# Altium PCB RelayPCB.PcbDoc
Units mil, origin at the board's own origin, x right, y up, seen from the top; angles counter-clockwise.
Board outline 3340 x 2160 mil, 2 copper layers (Top Layer, Bottom Layer); 61 components, 41 nets, 187 pads, 97 vias.
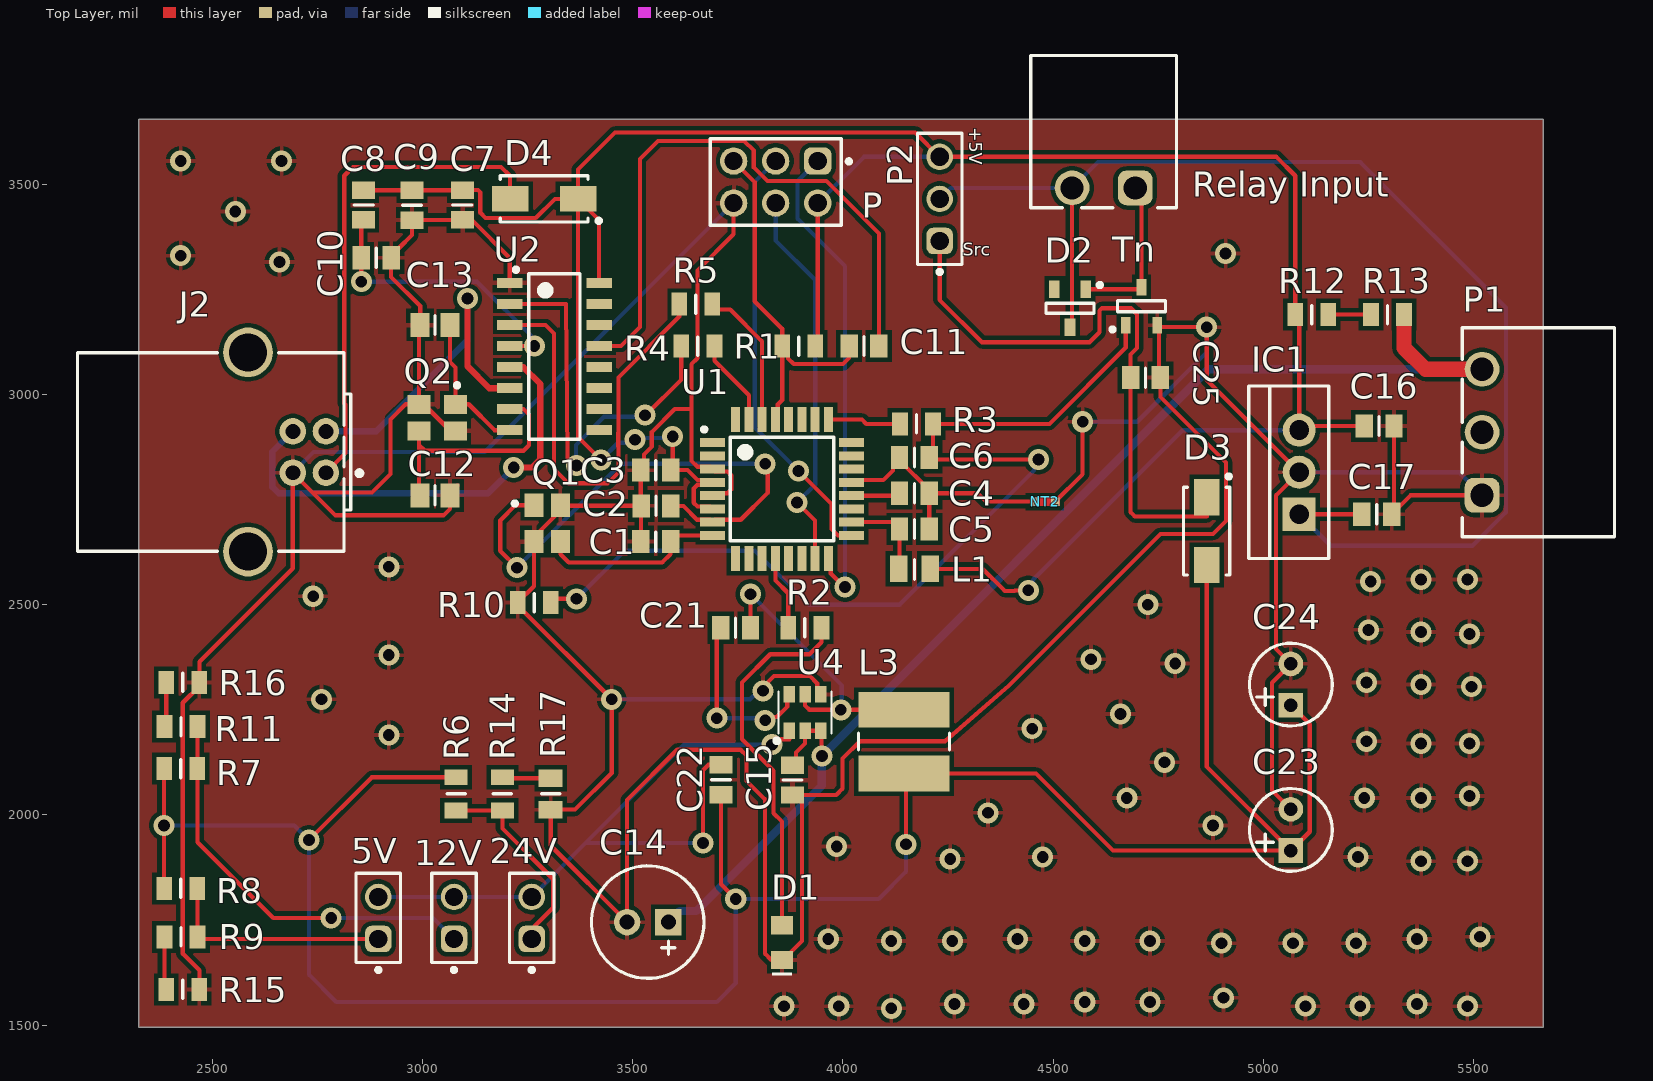
[diagram p0: Top Layer view]
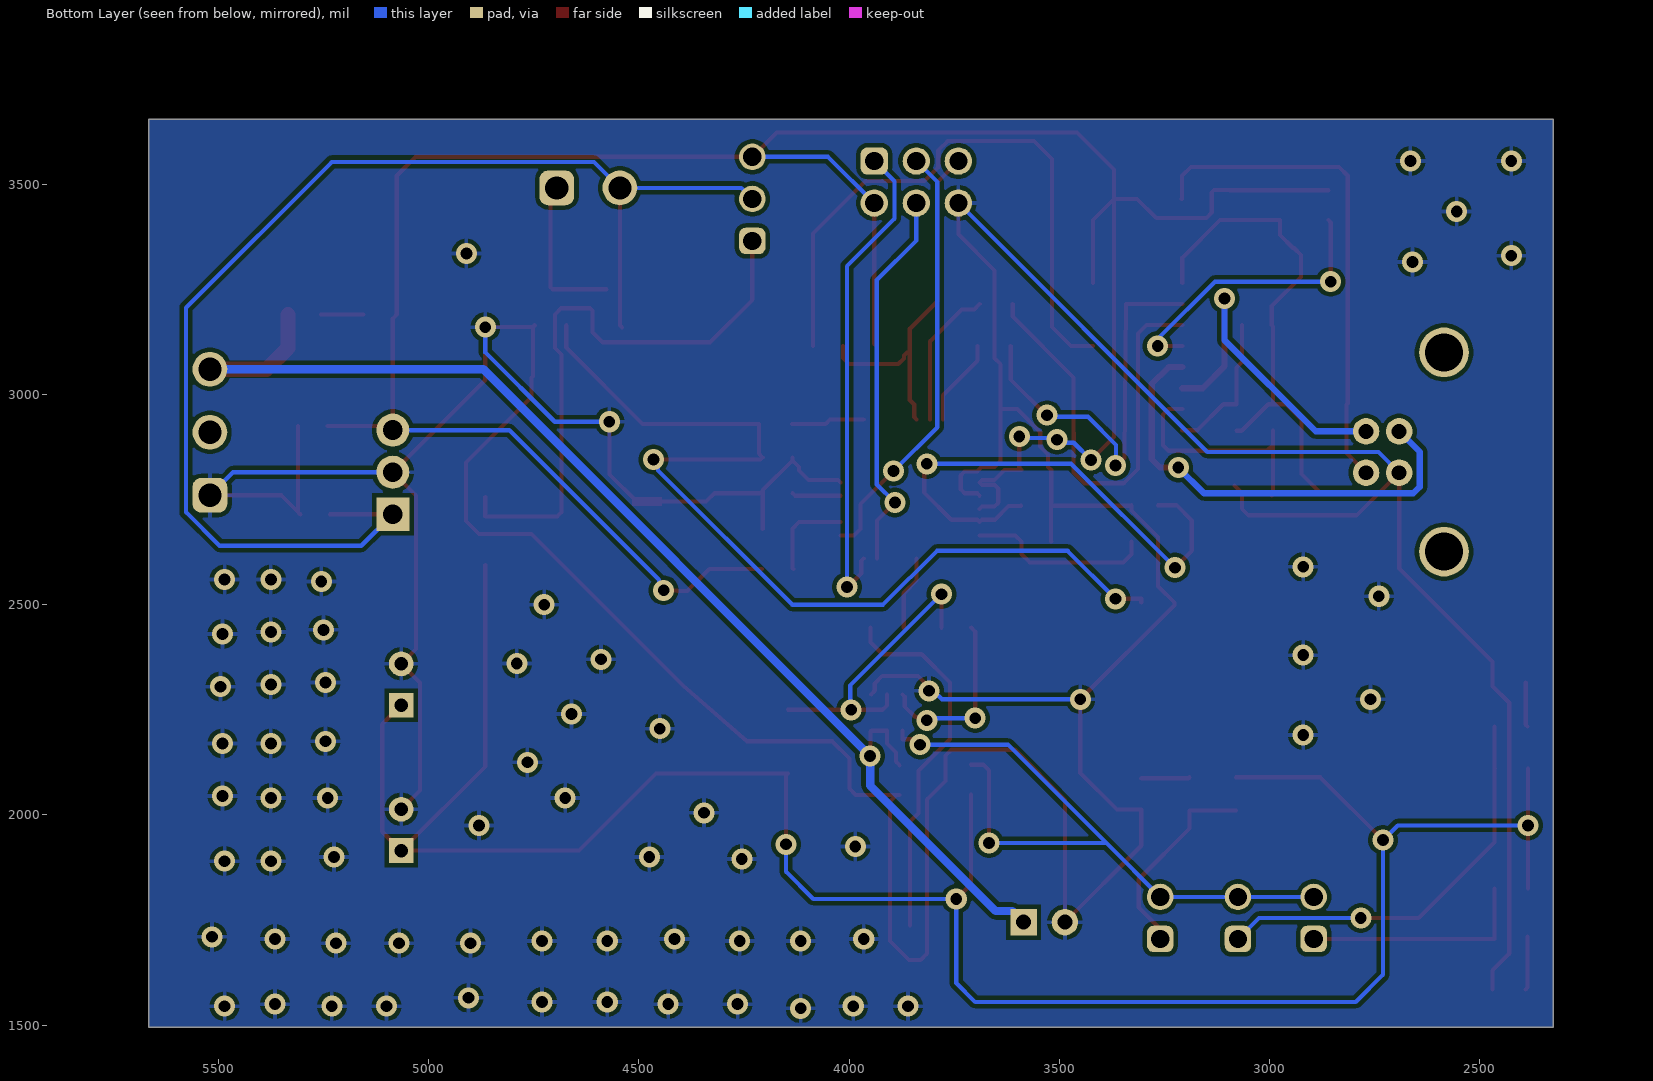
[diagram p1: Bottom Layer view, seen from below]
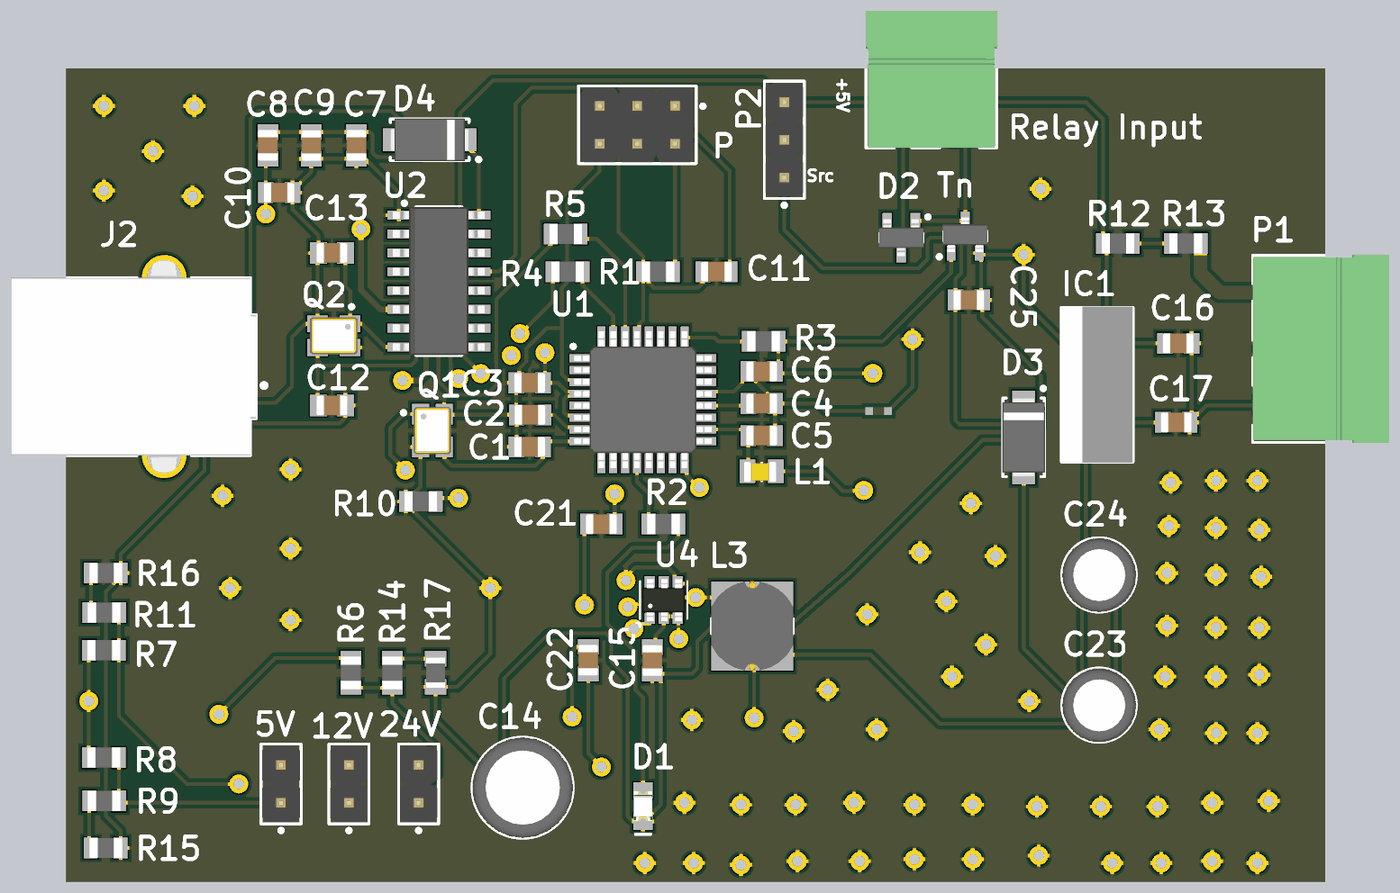
[diagram p2: 3D render of the assembled board from above, using the file's embedded part models]

## Layer stack, top to bottom
Top Solder: solder mask 0.4, Solder Resist, Dk 3.5
Top Layer: signal copper 1.4
Dielectric 1: dielectric 12.6, FR-4, Dk 4.8
Bottom Layer: signal copper 1.4
Bottom Solder: solder mask 0.4, Solder Resist, Dk 3.5

## Board outline
2325,1495 5665,1495 5665,3655 2325,3655

## Design rules (kind name [scope] priority, off if disabled: settings)
Clearance [All] p1: gap=10 ignorepadtopadclearanceinfootprint=TRUE
DiffPairsRouting [All] p1: maxlimit=10 minlimit=10 mostfreqgap=10 toplayer_minwidth=15 toplayer_maxwidth=15 toplayer_prefwidth=15 bottomlayer_minwidth=15 bottomlayer_maxwidth=15 bottomlayer_prefwidth=15 maxuncoupledlength=500
PolygonConnect [All] p1: connectstyle=Relief reliefconductorwidth=10 reliefentries=4 polygonreliefangle="90 Angle" airgapwidth=10
RoutingVias [All] p1: holewidth=28 width=50 viastyle="Through Hole" minholewidth=28 minwidth=50 maxholewidth=28 maxwidth=50
SolderMaskExpansion [All] p1: expansion=4 istentingtop=FALSE
Width [All] p1: maxlimit=50 minlimit=10 preferedwidth=10 bottomlayer_maxwidth=40 minimp=50.000000 maximp=50.000000 favimp=50.000000
29 further rules are at their usual default settings.

## Classes and differential pairs
component class Relay_USBtoUART: C7 C8 C9 C10 C11 C12 C13 D4 J2 Q2 R4 R5 U2
component class Relay_MCU: C1 C2 C3 C4 C5 D1 L1 P Q1 R1 R2 R12 R13 U1
component class Relay_Analog: 5V 12V 24V C6 C14 C15 C16 C17 C21 C22 C23 C24 C25 D2 D3 IC1 L3 NT2 P1 P2 R3 R6 R7 R8 R9 R10 R11 R14 R15 R16 R17 "Relay Input" Tn U4
differential pair D: +D_P -D_N

## Components (designator, comment, footprint, x,y, rotation, side; value= is the part's Value field where it differs from the comment)
5V "61300211121" 61300211121 2895,1755 r90 top
12V "61300211121" 61300211121 3075,1755 r90 top
24V "61300211121" 61300211121 3260,1755 r90 top
C1 "18pF" CAPC2012X135N 3554.57,2650 r0 top
C2 "18pF" CAPC2012X135N 3555.43,2735 r180 top
C3 "100nF" CAPC2012X135N 3554.57,2820 r0 top
C4 "100nF" CAPC2012X135N 4170,2765 r180 top
C5 "100nF" CAPC2012X135N 4170,2680 r180 top
C6 "100nF" CAPC2012X135N 4170,2850 r0 top
C7 "10uF" CAPC2012X135N 3095,3450.43 r90 top
C8 "100nF" CAPC2012X135N 2860,3450.43 r270 top
C9 "100nF" CAPC2012X135N 2975,3450 r90 top
C10 "100nF" CAPC2012X135N 2890,3325 r180 top
C11 "100nF" CAPC2012X135N 4050,3115 r180 top
C12 "22pF" CAPC2012X88N 3030,2760 r180 top
C13 "22pF" CAPC2012X88N 3030,3165 r0 top
C14 "100uF" CAPPR250-680X1250 3535.79,1745 r180 top
C15 "100nF" CAPC2012X135N 3880,2082.85 r90 top
C16 "100nF" CAPC2012X135N 5275,2925 r180 top
C17 "330nF" CAPC2012X135N 5269.57,2715 r180 top
C21 "100nF" CAPC2012X135N 3744.57,2445 r0 top
C22 "100pF" CAPC2012X135N 3710,2083.72 r270 top
C23 "22uF" CAPPR250-500X1100 5065,1964.21 r90 top
C24 "22uF" CAPPR250-500X1100 5065,2310 r90 top
C25 "100nF" CAPC2012X135N 4719.57,3040 r180 top
D1 "Red, 2V, 140°" WL-SMCW_0805_150080xx75000 3855,1696.34 r90 top
D2 "BAV99" SOT95P240X110-3N 4540,3205 r270 top
D3 "SS16" DIOM5127X229N 4865,2675 r270 top
D4 "SS16" DIOM5127X229N 3289.29,3465 r180 top
IC1 "LM7805CT/NOPB" TO-220-V 5085,2815 r90 top
J2 "USB 2.0" ASSMANN_A-USBSB 2731.06,2862.99 r270 top
L1 "10uH" INDC2014X145N 4170,2585 r180 top
L3 "10uH" IND_TRACO_TCK-047 4145,2174.21 r270 top
NT2 "" NET-TIE 4480,2745 r0 top net-tie
P "61300621121" 61300621121 3840,3505 r180 top
P1 "691322310003" 691322310003 5653.86,2910 r90 top
P2 "61300311121" 61300311121 4230,3465 r90 top
Q1 "16MHz" XTAL_EPSON_TSX-3225 3296.5,2693.31 r0 top
Q2 "12MHz" XTAL_EPSON_TSX-3225 3035,2945 r270 top
R1 "10k" RESC2012X60N 3895,3115 r0 top
R2 "1k" RESC2012X60N 3909.37,2445 r180 top
R3 "1k" RESC2012X60N 4175,2930 r0 top
R4 "470" RESC2012X60N 3655,3115 r0 top
R5 "470" RESC2012X60N 3650,3215 r0 top
R6 "470k" RESC2012X60N 3080,2050 r90 top
R7 "560k" RESC2012X60N 2425,2110 r180 top
R8 "820k" RESC2012X60N 2425,1825 r180 top
R9 "47k" RESC2012X60N 2425.63,1710 r0 top
R10 "1k" RESC2012X60N 3265.63,2505 r0 top
R11 "18k" RESC2012X60N 2425.63,2210 r0 top
R12 "0" RESC2012X60N 5115,3190 r180 top
R13 "0" RESC2012X60N 5295,3190 r0 top
R14 "15k" RESC2012X60N 3190,2050 r270 top
R15 "33k" RESC2012X60N 2430,1585 r180 top
R16 "22k" RESC2012X60N 2430,2315 r180 top
R17 "1k2" RESC2013X65N 3305,2050 r90 top
"Relay Input" "691322310002" 691322310002 4620,3625 r180 top
Tn "BC817" SOT95P230X110-3N 4710,3209.72 r90 top
U1 "ATMEGA328P-AU" QFP80P900X900X120-32N 3855,2775 r0 top
U2 "CH340G" SOIC-16 3313.7,3090 r0 top
U4 "AP63200WU-7" TSOT26 3910,2243.29 r0 top

## Footprints (in the part's own frame and the unit in brackets; to place one, negate y for a bottom-side part, rotate by r counter-clockwise, add the part's x,y. Pads: shape width x height; smd on the part's side, far side on the other; paste and mask are expansions set on the pad)
61300211121 [mm] "Pin Header, pitch 2.54 mm, THT, Vertical, single row, 2p"
  rrect50% 1.6x1.6 hole 1.1: 1(-1.27,0)
  round 1.6 hole 1.1: 2(1.27,0)
  silkscreen extent -3.26,-1.34 2.69,1.34, body extent -2.54,-1.27 2.54,1.27, height 8.57
61300311121 [mm] "Pin Header, pitch 2.54 mm, THT, Vertical, single row, 3p"
  rrect50% 1.6x1.6 hole 1.1: 1(-2.54,0)
  round 1.6 hole 1.1: 2(0,0) 3(2.54,0)
  silkscreen extent -4.53,-1.34 3.96,1.34, body extent -3.81,-1.27 3.81,1.27, height 8.57
61300621121 [mm] "Pin Header, pitch 2.54 mm, THT, Vertical, dual row, 6p"
  rrect50% 1.65x1.65 hole 1.1: 1(-2.54,-1.27)
  round 1.65 hole 1.1: 2(-2.54,1.27) 3(0,-1.27) 4(0,1.27) 5(2.54,-1.27) 6(2.54,1.27)
  silkscreen extent -4.54,-2.61 3.96,2.61, body extent -3.81,-2.54 3.81,2.54, height 8.59
691322310002 [mm] "Horizontal PCB Header, pitch 3.81mm, 02p"
  rrect50% 2.1x2.1 hole 1.4: 1(-1.905,3.4)
  round 2.1 hole 1.4: 2(1.905,3.4)
  silkscreen extent -4.4,-4.6 4.41,4.6, body extent -4.4,-4.6 4.41,4.6, height 7.25
691322310003 [mm] "Horizontal PCB Header, pitch 3.81mm, 03p"
  rrect50% 2.1x2.1 hole 1.4: 1(-3.81,3.4)
  round 2.1 hole 1.4: 2(0,3.4) 3(3.81,3.4)
  silkscreen extent -6.31,-4.6 6.31,4.6, body extent -6.31,-4.6 6.31,4.6, height 7.25
ASSMANN_A-USBSB [mm] "USB 2.0 Style B Right Angle 4 Contacts Receptacle"
  round 1.6 hole 0.9: 1(1.25,1) 2(-1.25,1) 3(-1.25,-1) 4(1.25,-1)
  round 3 hole 2.3: 5(-6.02,-3.71) 5(6.02,-3.71)
  silkscreen extent -6,-14.01 6,3.17, body extent -7.3,-14.01 7.3,2.49, height 10.85
CAPC2012X88N [mm] "Chip Capacitor, Body 2.0x1.25mm, IPC Medium Density"
  rect 1.15x1.45 smd: 1(-0.9,0) 2(0.9,0)
  silkscreen extent 0,-0.58 0,0.58, body extent -1.05,-0.67 1.05,0.68, height 0.9
CAPC2012X135N [mm] "Chip Capacitor, Body 2.0x1.25mm, IPC Medium Density"
  rect 1.05x1.4 smd: 1(-0.9,0) 2(0.9,0)
  silkscreen extent 0,-0.58 0,0.58, body extent -1.05,-0.67 1.05,0.68, height 1.25
CAPPR250-500X1100 [mm] "Capacitor, Radial, Pin spacing 2.5mm - Body Diameter 5.0mm X Body Height 11mm"
  rect 1.5x1.5 hole 0.8: 1(-1.25,0)
  round 1.5 hole 0.8: 2(1.25,0)
  silkscreen extent -2.5,-2.5 2.5,2.5, body extent -2.51,-2.51 2.49,2.49, height 10.9
CAPPR250-680X1250 [mm] "Capacitor, Radial, Pin spacing 2.5mm - Body Diameter 6.8mm X Body Height 12.5mm"
  rect 1.6x1.6 hole 0.9: 1(-1.25,0)
  round 1.6 hole 0.9: 2(1.25,0)
  silkscreen extent -3.4,-3.4 3.4,3.4, body extent -3.41,-3.41 3.39,3.39, height 12.5
DIOM5127X229N [mm] "DO-214-AC/SMA Diode, Molded Body; 5.10mm L X 2.67mm W X 2.29mm H, IPC Medium Density"
  rect 2.2x1.55 smd: 1(-2.05,0) 2(2.05,0)
  silkscreen extent -3.42,-1.4 2.65,1.45, body extent -2.67,-1.45 2.68,1.45, height 2.29
IND_TRACO_TCK-047 [mm] "SMD Common Mode Choke, Body 5.8x5.2mm"
  rect 2.15x5.5 smd: 1(-1.925,0) 2(1.925,0)
  silkscreen extent -0.5,-2.75 0.5,2.75, body extent -3.05,-2.75 3.05,2.75, height 5.15
INDC2014X145N [mm] "Chip Inductor, EIA 0805, Metric 2014, Body 2.05x1.4mm, IPC Medium Density"
  rect 1.05x1.6 smd: 1(-0.95,0) 2(0.95,0)
  silkscreen extent 0,-0.55 0,0.62, body extent -1,-0.66 1.2,0.74, height 1.45
NET-TIE [mil]
  rect 20x20 smd mask+4: 1(-25,0) 2(25,0)
  Top Layer region: -35,10 35,10 35,-10 -35,-10
QFP80P900X900X120-32N [mm] "QFP,0.80mm Pitch, Square; 32 Pin, 7.00mm L X 7.00mm W X 1.20mm H Body, IPC Medium Density"
  rect 1.5x0.55 smd: 1(-4.2,2.8) 2(-4.2,2) 3(-4.2,1.2) 4(-4.2,0.4) 5(-4.2,-0.4) 6(-4.2,-1.2) 7(-4.2,-2) 8(-4.2,-2.8) 17(4.2,-2.8) 18(4.2,-2) 19(4.2,-1.2) 20(4.2,-0.4) 21(4.2,0.4) 22(4.2,1.2) 23(4.2,2) 24(4.2,2.8)
  rect 0.55x1.5 smd: 9(-2.8,-4.2) 10(-2,-4.2) 11(-1.2,-4.2) 12(-0.4,-4.2) 13(0.4,-4.2) 14(1.2,-4.2) 15(2,-4.2) 16(2.8,-4.2) 25(2.8,4.2) 26(2,4.2) 27(1.2,4.2) 28(0.4,4.2) 29(-0.4,4.2) 30(-1.2,4.2) 31(-2,4.2) 32(-2.8,4.2)
  silkscreen extent -4.82,-3.13 3.13,3.72, body extent -4.62,-4.62 4.62,4.62, height 1.2
RESC2012X60N [mm] "Chip Resistor, EIA 0805, Metric 2012, Body 2.0x1.2mm, IPC Medium Density"
  rect 0.95x1.4 smd: 1(-1,0) 2(1,0)
  silkscreen extent 0,-0.55 0,0.55, body extent -1.1,-0.67 1.1,0.68, height 0.6
RESC2013X65N [mm] "Chip Resistor, EIA 0805, Metric 2013, Body 2.00x1.25mm, IPC Medium Density"
  rect 1.05x1.45 smd: 1(-0.95,0) 2(0.95,0)
  silkscreen extent 0,-0.55 0,0.55, body extent -1.02,-0.63 1.02,0.64, height 0.65
SOIC-16 [mm] "SOIC 16, Pitch 1.27mm - Body 4x10mm, IPC Medium Density"
  rect 1.55x0.6 smd: 1(-2.7,4.445) 2(-2.7,3.175) 3(-2.7,1.905) 4(-2.7,0.635) 5(-2.7,-0.635) 6(-2.7,-1.905) 7(-2.7,-3.175) 8(-2.7,-4.445) 9(2.7,-4.445) 10(2.7,-3.175) 11(2.7,-1.905) 12(2.7,-0.635) 13(2.7,0.635) 14(2.7,1.905) 15(2.7,3.175) 16(2.7,4.445)
  silkscreen extent -2.45,-5 1.55,5.37, body extent -3.1,-5 3.1,5, height 1.75
SOT95P230X110-3N [mm] "SOT23, 3 pin, Pitch 0.95mm - 1.3mm W X 2.9mm L X 1.1mm H, IPC Medium Density"
  rect 1x0.6 smd: 1(-1.15,0.95) 2(-1.15,-0.95) 3(1.15,0)
  silkscreen extent -1.52,-1.45 0.32,1.87, body extent -1.08,-1.5 1.25,1.5, height 1.1
SOT95P240X110-3N [mm] "SOT23 3-Leads, Pitch 0.95mm, Body 1.3x2.9mm, IPC Medium Density"
  rect 1.05x0.65 smd: 1(-1.15,0.95) 2(-1.15,-0.95) 3(1.15,0)
  silkscreen extent -1.52,-1.45 0.3,1.92, body extent -1.25,-1.5 1.25,1.5, height 1.1
TO-220-V [mm] "TO-220 3-Terminal - Vertical Mount"
  rect 2x2 hole 1.2: 1(-2.54,0)
  round 2 hole 1.2: 2(0,0) 3(2.54,0)
  silkscreen extent -5.21,-1.78 5.21,3.05, body extent -5.27,-1.75 5.27,2.95, height 20.5
TSOT26 [mm]
  rect 0.7x1 smd: 1(-0.95,-1.099) 2(0,-1.099) 3(0.95,-1.099) 4(0.95,1.099) 5(0,1.099) 6(-0.95,1.099)
  silkscreen extent -1.85,-1.84 1.6,1.27, body extent -1.45,-1.41 1.45,1.41, height 1.01
WL-SMCW_0805_150080xx75000 [mm] "SMD Mono-color Chip LED, body 2.0x1.25mm"
  rect 1.1x1.3 smd: 1(-1.05,0) 2(1.05,0)
  silkscreen extent -2,-0.6 -1.8,0.6, body extent -1,-0.63 1,0.62, height 0.7
XTAL_EPSON_TSX-3225 [mm] "Crystal TSX-3225 Serie, Corner Concave; 4 pin, 2.50mm L X 3.2mm W X 0.6mm H"
  rect 1.15x1.4 smd: 1(-0.8,1.1) 2(-0.8,-1.1) 3(0.8,-1.1) 4(0.8,1.1)
  silkscreen extent -2.07,1.08 -1.83,1.32, body extent -1.25,-1.6 1.25,1.6, height 0.6

## Part data
5V 12V 24V: "WR-PHD Pin Header, THT, Vertical, pitch 2.54mm, 1 Row, 2P", Contact Resistance=20mOhm, Manufacturer="Wurth Elektronik", Operating Temperature Max=105°C, Operating Temperature Min=-40°C, Rated Current=3A, Withstanding Voltage=500V, Working Voltage=250V, Category="Board-to-Board Connectors", ComponentLink1Description="Website Link", ComponentLink1URL=https://www.we-online.com/redexpert/article/61300211121?ad, ComponentLink2Description="Datasheet Link", ComponentLink2URL=https://www.we-online.com/redexpert/spec/61300211121?ad, Gender="Pin Header", Manufacturer Part Number=61300211121, Match Code=WR-PHD, Mount="Through Hole", Number of Pins=2, Number of Rows=1, Orientation=Vertical, Packaging=Bag, Pitch=2.54mm
C1 C2: library part CC0805_18PF_50V_5%_NP0, "Non-polarised capacitor", Case=0805, Manufacturer=GENERIC, Manufacturer1 ComponentHeight=1.35mm, Manufacturer1 Example=PHYCOMP, Manufacturer1 Part Number=223886115189, Tolerance=±5%, Voltage=50V, Author="CERN DEM JLC", Component Type=Standard, CreateDate=3.12.2007, HelpURL=\\cern.ch\dfs\Applications\Altium\Datasheets\CC0805_NP0_PHYCOMP.pdf, LatestRevisionDate=3.12.2007, Manufacturer Part Number=CC0805_18PF_50V_5%_NP0, Mounted=Yes, Part Description="SMD Multilayer Chip Ceramic Capacitor", Part Number=CC0805_18PF_50V_5%_NP0, Pin Count=2, Sense=No, SMD=Yes, Socket=No, Status=Preferred, TC=C0G/NP0
C3 C4 C5 C6 C8 C9 C10 C11 C15 C16 C21 C25: library part CC0805_100NF_50V_10%_X7R, "Non-polarised capacitor", Case=0805, Manufacturer=GENERIC, Manufacturer1 ComponentHeight=1mm, Manufacturer1 Example=TDK, Manufacturer1 Part Number=C2012X7R1H104K085, Tolerance=±10%, Voltage=50V, Author="CERN DEM JLC", Component Type=Standard, CreateDate=3.12.2007, HelpURL=\\cern.ch\dfs\Applications\Altium\Datasheets\CC0805_X7R_TDK_C.pdf, LatestRevisionDate=22.04.2015, Manufacturer Part Number=CC0805_100NF_50V_10%_X7R, Mounted=Yes, Part Description="SMD Multilayer Chip Ceramic Capacitor", Part Number=CC0805_100NF_50V_10%_X7R, Pin Count=2, Sense=No, SMD=Yes, Socket=No, Status=None, TC=X7R
C7: library part CC0805_10UF_10V_10%_X7R, "Non-polarised capacitor", Case=0805, Manufacturer=GENERIC, Manufacturer1 ComponentHeight=1.35mm, Manufacturer1 Example=MURATA, Manufacturer1 Part Number=GRM21BR71A106KE51L, Tolerance=±10%, Voltage=10V, Author="CERN DEM JLC", Component Type=Standard, CreateDate=30.04.2012, HelpURL=\\cern.ch\dfs\Applications\Altium\Datasheets\CC0805_X7R_MURATA.pdf, LatestRevisionDate=30.04.2012, Manufacturer Part Number=CC0805_10UF_10V_10%_X7R, Mounted=Yes, Part Description="SMD Multilayer Chip Ceramic Capacitor", Part Number=CC0805_10UF_10V_10%_X7R, Pin Count=2, Sense=No, SMD=Yes, Socket=No, Status=Preferred, TC=X7R
C12 C13: library part CC0805_22PF_200V_5%_C0G, "Non-polarised capacitor", Case=0805, Manufacturer=GENERIC, Manufacturer1 ComponentHeight=0.88mm, Manufacturer1 Example=KEMET, Manufacturer1 Part Number=C0805C220J2GAC, Tolerance=±5%, Voltage=200V, Author="CERN DEM MR", Component Type=Standard, CreateDate=2.06.2016, HelpURL="\\cern.ch\dfs\Applications\Altium\Datasheets\CC0805_C0G_KEMET_(Commercial Grade).pdf", LatestRevisionDate=2.06.2016, Manufacturer Part Number=CC0805_22PF_200V_5%_C0G, Mounted=Yes, Part Description="SMD Multilayer Chip Ceramic Capacitor", Part Number=CC0805_22PF_200V_5%_C0G, Pin Count=2, Sense=No, SMD=Yes, Socket=No, Status=None, TC=C0G/NP0
C14: library part CAER_100UF_25V_20%_NICHICON_UPS1E101MED, "Polarised capacitor", Case="LS2.5 D6.3 x H11", Manufacturer=NICHICON, Manufacturer Part Number=UPS1E101MED, Tolerance=±20%, Voltage=25V, Author="CERN DEM MR", Component Type=Standard, ComponentHeight=12.5mm, CreateDate=30.05.2016, HelpURL=\\cern.ch\dfs\Applications\Altium\Datasheets\CAER_NICHICON_UPS.pdf, LatestRevisionDate=30.05.2016, Mounted=Yes, Part Description="Aluminium Electrolytic Capacitor (UPS Series)", Part Number=CAER_100UF_25V_20%_NICHICON_UPS1E101MED, Pin Count=2, Sense=No, SMD=No, Socket=No, Status=None
C17: library part CC0805_330NF_16V_10%_X7R, "Non-polarised capacitor", Case=0805, Manufacturer=GENERIC, Manufacturer1 ComponentHeight=1.45mm, Manufacturer1 Example="YAGEO PHYCOMP", Manufacturer1 Part Number=CC0805KKX7R7BB334, Tolerance=±10%, Voltage=16V, Author="CERN DEM JLC", Component Type=Standard, CreateDate=3.12.2007, HelpURL="\\cern.ch\dfs\Applications\Altium\Datasheets\CC0805_X7R_YAGEO_HIGH CAPACITANCE_MAX50V.pdf", LatestRevisionDate=21.04.2015, Manufacturer Part Number=CC0805_330NF_16V_10%_X7R, Mounted=Yes, Part Description="SMD Multilayer Chip Ceramic Capacitor", Part Number=CC0805_330NF_16V_10%_X7R, Pin Count=2, Sense=No, SMD=Yes, Socket=No, Status=Preferred, TC=X7R
C22: library part CC0805_100PF_50V_5%_NP0, "Non-polarised capacitor", Case=0805, Manufacturer=GENERIC, Manufacturer1 ComponentHeight=1.35mm, Manufacturer1 Example=PHYCOMP, Manufacturer1 Part Number=223886115101, Tolerance=±5%, Voltage=50V, Author="CERN DEM JLC", Component Type=Standard, CreateDate=3.12.2007, HelpURL=\\cern.ch\dfs\Applications\Altium\Datasheets\CC0805_NP0_PHYCOMP.pdf, LatestRevisionDate=3.12.2007, Manufacturer Part Number=CC0805_100PF_50V_5%_NP0, Mounted=Yes, Part Description="SMD Multilayer Chip Ceramic Capacitor", Part Number=CC0805_100PF_50V_5%_NP0, Pin Count=2, Sense=No, SMD=Yes, Socket=No, Status=Preferred, TC=C0G/NP0
C23 C24: library part CAER_47UF_25V_20%_250-500X1100, "Polarised capacitor", Case="LS2.5 D5 x H11", Manufacturer=GENERIC, Manufacturer1 ComponentHeight=11mm, Manufacturer1 Example=PANASONIC, Manufacturer1 Part Number=EEUFC1E470, Part Number=CAER_22UF_25V_20%_250-500X1100, Tolerance=±20%, Voltage=25V, Author="CERN DEM JLC", Component Type=Standard, ComponentHeight=11mm, CreateDate=18.12.2007, HelpURL=\\cern.ch\dfs\Applications\Altium\Datasheets\CAER_PANASONIC_FC.pdf, LatestRevisionDate=18.12.2007, Manufacturer Part Number=CAER_47UF_25V_20%_250-500X1100, Mounted=Yes, Part Description="Aluminum Electrolytic Capacitor", Pin Count=2, Sense=No, SMD=No, Socket=No, Status=Preferred
D1: library part 150080RS75000, "WL-SMCW Mono-color Chip LED Waterclear, size 0805, Red, 2V, 140°", Case/Size Code=0805, Emitting Color=Red, Forward Voltage=2V, Manufacturer="Wurth Elektronik", Operating Temperature Max=85°C, Operating Temperature Min=-40°C, Category="Signal LEDs", Chip Technology=AlInGaP, ComponentLink1Description="Website Link", ComponentLink1URL=https://www.we-online.com/redexpert/article/150080RS75000?ad, ComponentLink2Description="Datasheet Link", ComponentLink2URL=https://www.we-online.com/redexpert/spec/150080RS75000?ad, Dominant Wavelength=625nm, Height=0.7mm, Length=2mm, Luminous Intensity=150mcd, Manufacturer Part Number=150080RS75000, Match Code=WL-SMCW, Mount="Surface Mount", Packaging="Tape and Reel", Peak Wavelength=630nm, Viewing Angle=140°, Width=1.25mm
D2: "Serial Diode", Case=SOT23-3, Manufacturer="FAIRCHILD SEMICONDUCTOR", Power=350mW, Voltage=70V, Author="CERN DEM JLC", Bonding=No, Component Type=Standard, ComponentHeight=1.1mm, CreateDate=6.05.2008, Device=BAV99, HelpURL=\\cern.ch\dfs\Applications\Altium\Datasheets\BAV99.pdf, LatestRevisionDate=27.09.2012, Manufacturer Part Number=BAV99, Mounted=Yes, PackageDescription="SOT, 0.95mm Pitch; 3 Pin, 1.40mm W X 3.00mm L X 1.10mm H body, IPC Medium Density", Part Description="Dual Series Signal Diode", Part Number=BAV99, Pin Count=3, PressFit=No, Sense=No, SMD=Yes, Socket=No
D3 D4: "Schottky Diode", Case=DO-214AC, Manufacturer="VISHAY GENERAL SEMICONDUCTOR", Power=1A, Voltage=60V, Author="CERN DEM JLC", Bonding=No, Component Type=Standard, ComponentHeight=2.29mm, CreateDate=15.07.2008, Device=SS16, HelpURL=\\cern.ch\dfs\Applications\Altium\Datasheets\SS16.pdf, LatestRevisionDate=23.08.2010, Manufacturer Part Number=SS16, Mounted=Yes, PackageDescription="DO-214-AC/SMA Diode, Molded Body; 5.10mm L X 2.67mm W X 2.29mm H, IPC Medium Density", Part Description="Surface Mount Schottky Barrier Rectifier", Part Number=SS16, Pin Count=2, PressFit=No, Sense=No, SMD=Yes, Socket=No
IC1: library part LM7805CT/NOPB_v, "3-Terminal Regulator 1=IN 2=GND 3=OUT", Case=TO-220, Manufacturer="TEXAS INSTRUMENTS", Manufacturer Part Number=LM7805CT, Author="CERN DEM JLC", Bonding=No, Component Type=Standard, ComponentHeight=18.95mm, CreateDate=18.12.2018, Device=LM7805CT/NOPB, HelpURL=\\cern.ch\dfs\Applications\Altium\Datasheets\LM7805CT-NOPB.pdf, LatestRevisionDate=1.06.2022, Mounted=Yes, PackageDescription="TO-220 3-Terminal + Tab - Vertical Mount", Part Description="3-Terminal 5V 1A Positive Voltage Regulator", Part Number=LM7805CT/NOPB_v, Pin Count=3, PressFit=No, Sense=No, SMD=No, Socket=No
J2: library part ASSMANN_A-USBSB, "4 Pin + 1 Shield USB Receptacle", Manufacturer=ASSMANN, Manufacturer Part Number=A-USBSB, Author="CERN DEM JLC", Component Type=Standard, ComponentHeight=10.85mm, CreateDate=17.04.2018, Family="USB 2.0", HelpURL=\\cern.ch\dfs\Applications\Altium\Datasheets\ASSMANN_A-USBSB.pdf, LatestRevisionDate=17.04.2018, Mounted=Yes, Part Description="USB 2.0 Style B Right Angle 4 Contacts Receptacle", Part Number=ASSMANN_A-USBSB, Pin Count=5, PressFit=No, Sense=No, SMD=No, Socket=No, Status=None
L1: library part IND0805_10NH_5%_EPCOS_B82498B, "Inductor With Core", Case=0805, Manufacturer=EPCOS, Manufacturer Part Number=B82498B3100J, Part Number=IND0805_10UH_5%_EPCOS_B82498B, Power=700mA, Resistance=0.03R, Tolerance=±5%, Author="CERN DEM JLC", Component Type=Standard, ComponentHeight=1.45mm, CreateDate=11.02.2008, HelpURL=\\cern.ch\dfs\Applications\Altium\Datasheets\IND0805_EPCOS_B82498B.pdf, LatestRevisionDate=26.06.2008, Mounted=Yes, Part Description="SMT Inductor SIMID Series", Pin Count=2, Sense=No, SMD=Yes, Socket=No, Status=Preferred
L3: library part IND_10UH_20%_TRACO_TCK-047, "Inductor With Core", Manufacturer="TRACO POWER", Manufacturer Part Number=TCK-047, Power=1.44A, Resistance=0.1R, Tolerance=±20%, Author="CERN DEM JLC", Component Type=Standard, ComponentHeight=4.85mm, CreateDate=16.11.2017, HelpURL=\\cern.ch\dfs\Applications\Altium\Datasheets\IND_TRACO_TCK-047.pdf, LatestRevisionDate=16.11.2017, Mounted=Yes, Part Description="SMD Common Mode Choke", Part Number=IND_10UH_20%_TRACO_TCK-047, Pin Count=2, Sense=No, SMD=Yes, Socket=No
NT2: library part "Net Tie", "Net Tie"
P: "WR-PHD Pin Header, THT, Vertical, pitch 2.54mm, 2 Row, 6P", Contact Resistance=20mOhm, Manufacturer="Wurth Elektronik", Operating Temperature Max=105°C, Operating Temperature Min=-40°C, Rated Current=3A, Withstanding Voltage=500V, Working Voltage=250V, Category="Board-to-Board Connectors", ComponentLink1Description="Website Link", ComponentLink1URL=https://www.we-online.com/redexpert/article/61300621121?ad, ComponentLink2Description="Datasheet Link", ComponentLink2URL=https://www.we-online.com/redexpert/spec/61300621121?ad, Gender="Pin Header", Manufacturer Part Number=61300621121, Match Code=WR-PHD, Mount="Through Hole", Number of Pins=6, Number of Rows=2, Orientation=Vertical, Packaging=Bag, Pitch=2.54mm
P1: "WR-TBL Series 322 Horizontal PCB Header, THT, pitch 3.81mm, 3p", Manufacturer="Wurth Elektronik", Operating Temperature Max=105°C, Operating Temperature Min=-40°C, Rated Current=10A, Working Voltage=300V, Application=Pluggable, Category="Terminal Blocks", ComponentLink1Description="Website Link", ComponentLink1URL=https://www.we-online.com/redexpert/article/691322310003?ad, ComponentLink2Description="Datasheet Link", ComponentLink2URL=https://www.we-online.com/redexpert/spec/691322310003?ad, Manufacturer Part Number=691322310003, Match Code=WR-TBL, Modularity=No, Mount="Through Hole", Number of Pins=3, Number of Rows=1, Orientation=Horizontal, Packaging=Box, Pitch=3.81mm
P2: "WR-PHD Pin Header, THT, Vertical, pitch 2.54mm, 1 Row, 3P", Contact Resistance=20mOhm, Manufacturer="Wurth Elektronik", Operating Temperature Max=105°C, Operating Temperature Min=-40°C, Rated Current=3A, Withstanding Voltage=500V, Working Voltage=250V, Category="Board-to-Board Connectors", ComponentLink1Description="Website Link", ComponentLink1URL=https://www.we-online.com/redexpert/article/61300311121?ad, ComponentLink2Description="Datasheet Link", ComponentLink2URL=https://www.we-online.com/redexpert/spec/61300311121?ad, Gender="Pin Header", Manufacturer Part Number=61300311121, Match Code=WR-PHD, Mount="Through Hole", Number of Pins=3, Number of Rows=1, Orientation=Vertical, Packaging=Bag, Pitch=2.54mm
Q1: library part "XTAL_40MHZ_EPSON_TSX-3225 40.0000MF10Z-B6", "Crystal 4 pins 1=XTAL Control 2=GND3=XTAL 4=GND", Manufacturer=EPSON, Manufacturer Part Number="TSX-3225 40.0000MF10Z-B6", Part Number="XTAL_16MHZ_EPSON_TSX-3225 40.0000MF10Z-B6", Author="CERN DEM HF", Bonding=No, Component Type=Standard, ComponentHeight=0.6mm, ComponentLink1Description="Ordering Informations", ComponentLink1URL=\\cern.ch\dfs\Applications\Altium\Datasheets\XTAL_EPSON_TSX-3225_Ordering-Informations.pdf, CreateDate=24.10.2023, HelpURL=\\cern.ch\dfs\Applications\Altium\Datasheets\XTAL_EPSON_TSX-3225.pdf, LatestRevisionDate=24.10.2023, Mounted=Yes, PackageDescription="Crystal, Corner Concave; 4 Pin, 2.50mm L X 3.20mm W X 0.6mm H, TSX-3225 Serie", Part Description="Tolerance: ±10ppm,  Stability:±10ppm, -20°C to 75°C, 10pF, Surface Mount Quartz Crystal, TX-3225 Series", Pin Count=4, PressFit=No, Sense=No, SMD=Yes, Socket=No
Q2: library part "XTAL_40MHZ_EPSON_TSX-3225 40.0000MF10Z-B6", "Crystal 4 pins 1=XTAL Control 2=GND3=XTAL 4=GND", Manufacturer=EPSON, Manufacturer Part Number="TSX-3225 12.0000MF10Z-B6", Part Number="XTAL_12MHZ_EPSON_TSX-3225 12.0000MF10Z-B6", Author="CERN DEM HF", Bonding=No, Component Type=Standard, ComponentHeight=0.6mm, ComponentLink1Description="Ordering Informations", ComponentLink1URL=\\cern.ch\dfs\Applications\Altium\Datasheets\XTAL_EPSON_TSX-3225_Ordering-Informations.pdf, CreateDate=24.10.2023, HelpURL=\\cern.ch\dfs\Applications\Altium\Datasheets\XTAL_EPSON_TSX-3225.pdf, LatestRevisionDate=24.10.2023, Mounted=Yes, PackageDescription="Crystal, Corner Concave; 4 Pin, 2.50mm L X 3.20mm W X 0.6mm H, TSX-3225 Serie", Part Description="Tolerance: ±10ppm,  Stability:±10ppm, -20°C to 75°C, 10pF, Surface Mount Quartz Crystal, TX-3225 Series", Pin Count=4, PressFit=No, Sense=No, SMD=Yes, Socket=No
R1: library part R0805_10K_1%_0.125W_100PPM, "Resistor - 5%", Case=0805, Manufacturer=GENERIC, Manufacturer1 ComponentHeight=0.6mm, Manufacturer1 Example="NIC COMPONENT", Manufacturer1 Part Number=NRC10F1002TRF, Manufacturer Part Number=R0805_10K_5%_0.125W_100PPM, Power=0.125W, Tolerance=±5%, Author="CERN DEM JLC", Component Type=Standard, CreateDate=3.12.2007, HelpURL=\\cern.ch\dfs\Applications\Altium\Datasheets\R0805_NIC_NRC.pdf, LatestRevisionDate=13.03.2008, Mounted=Yes, Part Description="General Purpose Thick Film Chip Resistor", Part Number=R0805_10K_5%_0.125W_100PPM, Pin Count=2, PressFit=No, Sense=No, SMD=Yes, Socket=No, Status=Preferred, TC=±100ppm/°C
R2 R3 R10: library part R0805_1K_1%_0.125W_100PPM, "Resistor - 5%", Case=0805, Manufacturer=GENERIC, Manufacturer1 ComponentHeight=0.6mm, Manufacturer1 Example="NIC COMPONENT", Manufacturer1 Part Number=NRC10F1001TRF, Manufacturer Part Number=R0805_1K_5%_0.125W_100PPM, Power=0.125W, Tolerance=±5%, Author="CERN DEM JLC", Component Type=Standard, CreateDate=3.12.2007, HelpURL=\\cern.ch\dfs\Applications\Altium\Datasheets\R0805_NIC_NRC.pdf, LatestRevisionDate=13.03.2008, Mounted=Yes, Part Description="General Purpose Thick Film Chip Resistor", Part Number=R0805_1K_5%_0.125W_100PPM, Pin Count=2, PressFit=No, Sense=No, SMD=Yes, Socket=No, Status=Preferred, TC=±100ppm/°C
R4 R5: library part R0805_470R_1%_0.125W_100PPM, "Resistor - 5%", Case=0805, Manufacturer=GENERIC, Manufacturer1 ComponentHeight=0.6mm, Manufacturer1 Example="NIC COMPONENT", Manufacturer1 Part Number=NRC10F4700TRF, Manufacturer Part Number=R0805_470R_5%_0.125W_100PPM, Power=0.125W, Tolerance=±5%, Author="CERN DEM JLC", Component Type=Standard, CreateDate=3.12.2007, HelpURL=\\cern.ch\dfs\Applications\Altium\Datasheets\R0805_NIC_NRC.pdf, LatestRevisionDate=13.03.2008, Mounted=Yes, Part Description="General Purpose Thick Film Chip Resistor", Part Number=R0805_470R_5%_0.125W_100PPM, Pin Count=2, PressFit=No, Sense=No, SMD=Yes, Socket=No, Status=Preferred, TC=±100ppm/°C
R6: library part R0805_470K_1%_0.125W_100PPM, "Resistor - 1%", Case=0805, Manufacturer=GENERIC, Manufacturer1 ComponentHeight=0.6mm, Manufacturer1 Example="NIC COMPONENT", Manufacturer1 Part Number=NRC10F4703TRF, Power=0.125W, Tolerance=±1%, Author="CERN DEM JLC", Component Type=Standard, CreateDate=3.12.2007, HelpURL=\\cern.ch\dfs\Applications\Altium\Datasheets\R0805_NIC_NRC.pdf, LatestRevisionDate=13.03.2008, Manufacturer Part Number=R0805_470K_1%_0.125W_100PPM, Mounted=Yes, Part Description="General Purpose Thick Film Chip Resistor", Part Number=R0805_470K_1%_0.125W_100PPM, Pin Count=2, PressFit=No, Sense=No, SMD=Yes, Socket=No, Status=Preferred, TC=±100ppm/°C
R7: library part R0805_560K_1%_0.125W_100PPM, "Resistor - 1%", Case=0805, Manufacturer=GENERIC, Manufacturer1 ComponentHeight=0.6mm, Manufacturer1 Example="NIC COMPONENT", Manufacturer1 Part Number=NRC10F5603TRF, Power=0.125W, Tolerance=±1%, Author="CERN DEM JLC", Component Type=Standard, CreateDate=3.12.2007, HelpURL=\\cern.ch\dfs\Applications\Altium\Datasheets\R0805_NIC_NRC.pdf, LatestRevisionDate=13.03.2008, Manufacturer Part Number=R0805_560K_1%_0.125W_100PPM, Mounted=Yes, Part Description="General Purpose Thick Film Chip Resistor", Part Number=R0805_560K_1%_0.125W_100PPM, Pin Count=2, PressFit=No, Sense=No, SMD=Yes, Socket=No, Status=Preferred, TC=±100ppm/°C
R8: library part R0805_820K_1%_0.125W_100PPM, "Resistor - 1%", Case=0805, Manufacturer=GENERIC, Manufacturer1 ComponentHeight=0.6mm, Manufacturer1 Example="NIC COMPONENT", Manufacturer1 Part Number=NRC10F8203TRF, Power=0.125W, Tolerance=±1%, Author="CERN DEM JLC", Component Type=Standard, CreateDate=3.12.2007, HelpURL=\\cern.ch\dfs\Applications\Altium\Datasheets\R0805_NIC_NRC.pdf, LatestRevisionDate=13.03.2008, Manufacturer Part Number=R0805_820K_1%_0.125W_100PPM, Mounted=Yes, Part Description="General Purpose Thick Film Chip Resistor", Part Number=R0805_820K_1%_0.125W_100PPM, Pin Count=2, PressFit=No, Sense=No, SMD=Yes, Socket=No, Status=Preferred, TC=±100ppm/°C
R9: library part R0805_47K_0.1%_0.125W_25PPM, "Resistor - 0.1%", Case=0805, Manufacturer=GENERIC, Manufacturer1 ComponentHeight=0.6mm, Manufacturer1 Example=PANASONIC, Manufacturer1 Part Number=ERA6AEB473V, Power=0.125W, Tolerance=±0.1%, Author="CERN DEM JLC", Component Type=Standard, CreateDate=18.10.2010, HelpURL=\\cern.ch\dfs\Applications\Altium\Datasheets\R0805_PANASONIC_ERA.pdf, LatestRevisionDate=18.10.2010, Manufacturer Part Number=R0805_47K_0.1%_0.125W_25PPM, Mounted=Yes, Part Description="Thin Film Chip Resistor", Part Number=R0805_47K_0.1%_0.125W_25PPM, Pin Count=2, PressFit=No, Sense=No, SMD=Yes, Socket=No, Status="Not Recommended", TC=±25ppm
R11: library part R0805_18K_1%_0.125W_100PPM, "Resistor - 1%", Case=0805, Manufacturer=GENERIC, Manufacturer1 ComponentHeight=0.6mm, Manufacturer1 Example="NIC COMPONENT", Manufacturer1 Part Number=NRC10F1802TRF, Power=0.125W, Tolerance=±1%, Author="CERN DEM JLC", Component Type=Standard, CreateDate=3.12.2007, HelpURL=\\cern.ch\dfs\Applications\Altium\Datasheets\R0805_NIC_NRC.pdf, LatestRevisionDate=13.03.2008, Manufacturer Part Number=R0805_18K_1%_0.125W_100PPM, Mounted=Yes, Part Description="General Purpose Thick Film Chip Resistor", Part Number=R0805_18K_1%_0.125W_100PPM, Pin Count=2, PressFit=No, Sense=No, SMD=Yes, Socket=No, Status=Preferred, TC=±100ppm/°C
R12 R13: library part R0805_0R_JUMPER, "Resistor", Case=0805, Manufacturer=GENERIC, Manufacturer1 ComponentHeight=0.6mm, Manufacturer1 Example="NIC COMPONENT", Manufacturer1 Part Number=NRC10Z0, Author="CERN DEM JLC", Component Type=Standard, CreateDate=3.12.2007, HelpURL=\\cern.ch\dfs\Applications\Altium\Datasheets\R0805_NIC_NRC.pdf, LatestRevisionDate=13.03.2008, Manufacturer Part Number=R0805_0R_JUMPER, Mounted=Yes, Part Description="2A (0.05R Max DC Resistance) Zero Ohm Jumper", Part Number=R0805_0R_JUMPER, Pin Count=2, PressFit=No, Sense=No, SMD=Yes, Socket=No, Status=Preferred
R14: library part R0805_15K_1%_0.125W_100PPM, "Resistor - 1%", Case=0805, Manufacturer=GENERIC, Manufacturer1 ComponentHeight=0.6mm, Manufacturer1 Example="NIC COMPONENT", Manufacturer1 Part Number=NRC10F1502TRF, Power=0.125W, Tolerance=±1%, Author="CERN DEM JLC", Component Type=Standard, CreateDate=13.05.2013, HelpURL=\\cern.ch\dfs\Applications\Altium\Datasheets\R0805_NIC_NRC.pdf, LatestRevisionDate=13.05.2013, Manufacturer Part Number=R0805_15K_1%_0.125W_100PPM, Mounted=Yes, Part Description="General Purpose Thick Film Chip Resistor", Part Number=R0805_15K_1%_0.125W_100PPM, Pin Count=2, PressFit=No, Sense=No, SMD=Yes, Socket=No, Status=Preferred, TC=±100ppm/°C
R15: library part R0805_33K_1%_0.125W_100PPM, "Resistor - 1%", Case=0805, Manufacturer=GENERIC, Manufacturer1 ComponentHeight=0.6mm, Manufacturer1 Example="NIC COMPONENT", Manufacturer1 Part Number=NRC10F3302TRF, Power=0.125W, Tolerance=±1%, Author="CERN DEM JLC", Component Type=Standard, CreateDate=3.12.2007, HelpURL=\\cern.ch\dfs\Applications\Altium\Datasheets\R0805_NIC_NRC.pdf, LatestRevisionDate=13.03.2008, Manufacturer Part Number=R0805_33K_1%_0.125W_100PPM, Mounted=Yes, Part Description="General Purpose Thick Film Chip Resistor", Part Number=R0805_33K_1%_0.125W_100PPM, Pin Count=2, PressFit=No, Sense=No, SMD=Yes, Socket=No, Status=Preferred, TC=±100ppm/°C
R16: library part R0805_22K_1%_0.125W_100PPM, "Resistor - 1%", Case=0805, Manufacturer=GENERIC, Manufacturer1 ComponentHeight=0.6mm, Manufacturer1 Example="NIC COMPONENT", Manufacturer1 Part Number=NRC10F2202TRF, Power=0.125W, Tolerance=±1%, Author="CERN DEM JLC", Component Type=Standard, CreateDate=3.12.2007, HelpURL=\\cern.ch\dfs\Applications\Altium\Datasheets\R0805_NIC_NRC.pdf, LatestRevisionDate=13.03.2008, Manufacturer Part Number=R0805_22K_1%_0.125W_100PPM, Mounted=Yes, Part Description="General Purpose Thick Film Chip Resistor", Part Number=R0805_22K_1%_0.125W_100PPM, Pin Count=2, PressFit=No, Sense=No, SMD=Yes, Socket=No, Status=Preferred, TC=±100ppm/°C
R17: library part R0805_1K2_0.1%_0.1W_25PPM, "Resistor - 0.1%", Case=0805, Manufacturer=GENERIC, Manufacturer1 ComponentHeight=0.65mm, Manufacturer1 Example="TYCO ELECTRONICS", Manufacturer1 Part Number=CPF0805B1K2E, Power=0.1W, Tolerance=±0.1%, Author="CERN DEM JMW", Component Type=Standard, CreateDate=21.05.2010, HelpURL=\\cern.ch\dfs\Applications\Altium\Datasheets\R0805_TYCO_CPF.pdf, LatestRevisionDate=21.05.2010, Manufacturer Part Number=R0805_1K2_0.1%_0.1W_25PPM, Mounted=Yes, Part Description="Thin Film Precision Resistor", Part Number=R0805_1K2_0.1%_0.1W_25PPM, Pin Count=2, PressFit=No, Sense=No, SMD=Yes, Socket=No, Status="Not Recommended", TC=±25ppm/°C
"Relay Input": "WR-TBL Series 322 Horizontal PCB Header, THT, pitch 3.81mm, 2p", Manufacturer="Wurth Elektronik", Operating Temperature Max=105°C, Operating Temperature Min=-40°C, Rated Current=10A, Working Voltage=300V, Application=Pluggable, Category="Terminal Blocks", ComponentLink1Description="Website Link", ComponentLink1URL=https://www.we-online.com/redexpert/article/691322310002?ad, ComponentLink2Description="Datasheet Link", ComponentLink2URL=https://www.we-online.com/redexpert/spec/691322310002?ad, Manufacturer Part Number=691322310002, Match Code=WR-TBL, Modularity=No, Mount="Through Hole", Number of Pins=2, Number of Rows=1, Orientation=Horizontal, Packaging=Box, Pitch=3.81mm
Tn: "NPN Transistor", Case=SOT23-3, Manufacturer="NXP SEMICONDUCTORS", Author="CERN DEM JLC", Bonding=No, Component Type=Standard, ComponentHeight=1.1mm, CreateDate=12.05.2011, Device=BC817, HelpURL=\\cern.ch\dfs\Applications\Altium\Datasheets\BC817.pdf, LatestRevisionDate=12.05.2011, Manufacturer Part Number=BC817, Mounted=Yes, PackageDescription="SOT23, 0.95mm Pitch; 3 Pin, 1.30mm W X 2.90mm L X 1.10mm H body, IPC Medium Density", Part Description="45V 500mA NPN General-Purpose Transistor", Part Number=BC817, Pin Count=3, PressFit=No, Sense=No, SMD=Yes, Socket=No
U1: "8-bit AVR Microcontroller, 32KB Flash, 1KB EEPROM, 2KB SRAM, 32-Pin TQFP", Case=QFP32, Manufacturer=ATMEL, Author="CERN DEM JLC", Bonding=No, Component Type=Standard, ComponentHeight=1.2mm, CreateDate=2.07.2014, Device=ATMEGA328P-AU, HelpURL=\\cern.ch\dfs\Applications\Altium\Datasheets\ATMEGA328P-AU.pdf, LatestRevisionDate=2.07.2014, Manufacturer Part Number=ATMEGA328P-AU, Mounted=Yes, PackageDescription="QFP, 0.80mm Pitch, Square; 32 Pin, 7.00mm L X 7.00mm W X 1.20mm H body, IPC Medium Density", Part Description="8-bit AVR Microcontroller, 32KB Flash, 1KB EEPROM, 2KB SRAM, 32-Pin TQFP, Industrial Grade (-40°C to 85°C)", Part Number=ATMEGA328P-AU, Pin Count=32, PressFit=No, Sense=No, SMD=Yes, Socket=No
U2: "USB to UART Converter SOP16", Manufacturer Part Number=CH340G
U4: "Switching Regulator", Manufacturer=Diodes, Supplier Part Number=2108618, Category="Voltage Regulators - Switching", ComponentLink1Description=https://datasheet.ciiva.com:443/pdfs/VipMasterIC/IC/DIOD/DIOD-S-A0007089856/DIOD-S-A0007089856-1.pdf?src-supplier=IHS+Markit, ComponentLink1URL=https://datasheet.ciiva.com:443/pdfs/VipMasterIC/IC/DIOD/DIOD-S-A0007089856/DIOD-S-A0007089856-1.pdf?src-supplier=IHS+Markit, ComponentLink2Description=https://www.diodes.com/assets/Datasheets/AP63200-AP63201-AP63203-AP63205.pdf?src-supplier=Digikey, ComponentLink2URL=https://www.diodes.com/assets/Datasheets/AP63200-AP63201-AP63203-AP63205.pdf?src-supplier=Digikey, Manufacturer Part Number=AP63200WU-7, Pricing="3000=0,285, 6000=0,28, 9000=0,275, 12000=0,275, 15000=0,27 (USD)", RoHS=Yes, Stock=9000, Supplier="Future Electronics"

## Via types
v1: diameter 50, hole 28, Top Layer to Bottom Layer, 97 vias

## Nets (pads, with @x,y where several pads share a name; then routed paths per layer and width w, separated by ;. In a path a pad name is that pad's centre, name@x,y a point inside that pad or via, vN(x,y) a via of type N, cw(c..) or ccw(c..) an arc to the next point about the centre after c; other vN are vias at no path point)
+5: C3.2 C7.2 C8.1 C9.2 C16.2 D4.1 IC1.3 L1.1 P2.3 P.2 R1.2 R12.2 U1.4 U1.6 U2.16 | length 6336.1
  Top Layer w10: C8.1@2860.43,3485.43 C7.2@3094.57,3485.43 ; C7.2 3131.7,3485.87 3137.56,3480.01 3137.56,3431.93 3150,3419.49 3269.49,3419.49 3315,3465 D4.1 ; U2.16 3420,3415 D4.1 ; v1(3424.72,2844.28) 3370,2899 D4.1 ; v1(3595,2900) 3595,2825 C3.2 3630.32,2820 3653.91,2796.42 3683.98,2796.42 U1.4 3683.98,2785.08 3653.91,2785.08 3645.12,2776.29 3645.12,2742.21 3653.91,2733.43 3683.98,2733.43 U1.6 ; R1.2 3940,3120.63 P.2 ; L1.1 4332.38,2585 4385,2532.38 4408.14,2532.38 4409.11,2533.35 4439.91,2533.35 v1(4440.78,2534.22) ; C16.2 5095,2925 IC1.3 5085,3180.63 R12.2 5075.63,3520 5030.63,3565 P2.3 4172,3623 3458,3623 3370,3535 D4.1
  Bottom Layer w10: v1(3424.72,2844.28) 3465.5,2885.06 3498.17,2885.06 v1(3505.5,2892.39) 3509.3,2896.19 3591.19,2896.19 v1(3595,2900) ; P.2 4050,3565 P2.3 ; v1(4440.78,2534.22) 4440.78,2545.04 4452.28,2556.54 4452.28,2559.28 4808,2915 IC1.3
AGND: C4.1 C5.1 C6.1 NT2.1 U1.21 | length 597.8
  Top Layer w10: U1.21 4026.02,2796.42 4096.04,2796.42 4118.9,2819.27 4118.9,2827.44 4134.32,2842.87 C6.1@4134.57,2842.87 ; C6.1 C6.1@4134.57,2842.87 ; C5.1 C4.1 ; NT2.1 4340,2745 4320,2765 C4.1 ; C6.1@4134.57,2842.87 4205.43,2772 C4.1
D_N: J2.2 U2.6 | length 808.3
  Top Layer w15: v1(3107,3228) 3107,3067 3159,3015 U2.6
  Bottom Layer w15: J2.2 2890.2,2912.2 3107,3129 v1(3107,3228)
D_P: J2.3 U2.5 | length 1097.9
  Top Layer w15: U2.5 3240,3065 3280,3025 3280,2846 3260,2826 v1(3217,2826)
  Bottom Layer w15: J2.3 2642.7,2863.21 2642.7,2780 2657.91,2764.78 3155.78,2764.78 v1(3217,2826)
FB: 5V.2 12V.2 24V.2 C22.1 U4.1 | length 1653.5
  Top Layer w10: v1(3667,1933) 3667,2106.15 3680,2119.15 C22.1 ; v1(3831,2167) 3844,2180 3872.6,2180 U4.1
  Bottom Layer w10: 5V.2 12V.2 24V.2 3388,1933 ; v1(3667,1933) 3388,1933 ; v1(3831,2167) 3622,2167 3388,1933
GND: C1.1 C2.2 C3.1 C7.1 C9.1 C10.1 C12.1 C13.1 C14.2 C15.1 C16.1 C17.1 C23.2 C24.2 C25.1 D1.1 IC1.2 J2.4 NT2.2 P1.1 P.6 Q1.2 Q1.4 Q2.2 Q2.4 R10.1 R15.1 R16.1 R17.1 Tn.2 U1.3 U1.5 U2.1 U4.4 | length 14197.2
  Top Layer w10: R15.1 2469.37,1630.63 2430,1670 2430,2266.63 2469.37,2306 R16.1 2469.37,2364.37 2691.69,2586.69 J2.4 2738.47,2767 ; C9.1 2975,3378.9 2943.66,3347.56 2941.1,3347.56 2925.43,3331.89 C10.1 2925.43,3279.13 2994.57,3210 C13.1 ; C9.1@2975.43,3415 C7.1 3117.56,3415 3207.4,3325.16 U2.1 ; Q2.2@2991.86,2976.66 2991.86,3161.96 C13.1@2994.73,3164.83 ; Q2.4 3065.99,2913.5 3003,2976.5 Q2.2 2960,2976.5 2924,2940.5 2924,2811 2880,2767 2738.47,2767 ; C12.1@3083.07,2783.54 3065.43,2765.91 C12.1 3065.43,2727.87 3050,2712.43 2793.04,2712.43 2738.47,2767 ; C1.1 3520,2650.87 C2.2 ; U1.5 3695.32,2764.92 3725.39,2764.92 3734.17,2773.71 3734.17,2807.79 3725.39,2816.57 3695.32,2816.57 U1.3 3683.98,2827.91 3653.91,2827.91 3640,2841.82 3640,2965 ; P.6 3740,3381 3653.82,3294.82 3653.82,3286.54 3654.01,3286.35 3654.01,3085.91 3640,3071.9 3640,2965 ; v1(3810,2295) 3810,2304.14 3835.86,2330 3921.25,2330 3938.78,2312.47 3938.78,2295.2 U4.4 ; C15.1 C15.1@3886.89,2047.42 ; NT2.2 4570,2810 v1(4570,2935) ; Tn.2 Tn.2@4751.85,3160 ; C23.2 5020,2058.43 5020,2314.21 C24.2 5030,2394.21 5030,2760 IC1.2 4865,3035 v1(4865,3160) Tn.2@4751.85,3160 ; C17.1 C17.1@5310.43,2720.43 ; C16.1 C17.1@5310.43,2720.43 ; P1.1 5350,2760 C17.1@5310.43,2720.43 ; C2.2 3329.61,2735 Q1.4 3327.99,2723.99 3265,2661 Q1.2 3265,2543.74 R10.1 3226.26,2498.74 v1(3450,2275) 3450,2100 3362.6,2012.6 R17.1 3305,1926.57 C14.2 3486.57,2035.57 3606,2155 3756.72,2155 3770.82,2140.9 3770.82,2080.61 3814.41,2037.02 3814.41,1670 3829.41,1655 D1.1 3857.58,1655 3902.56,1699.98 3902.56,2031.75 C15.1@3886.89,2047.42 ; C2.2 3519.13,2735.87 C3.1 3526.7,2827.57 3526.7,2857.02 3545.5,2875.82 3545.5,2910.5 3600,2965 3640,2965 ; C15.1@3886.89,2047.42 3983.99,2047.42 3999,2062.43 3999,2134 4040,2175 4243,2175 4395,2308 4755,2668 4880,2668 4911,2699 4911,2838 4755,2994 C25.1 4751.85,3043.15 Tn.2@4751.85,3160
  Bottom Layer w10: J2.4 2740.91,2863 3148,2863 P.6 ; v1(3450,2275) 3779.18,2275 3799.18,2295 v1(3810,2295) ; v1(4570,2935) 4700,2935 4865,3100 v1(4865,3160) ; IC1.2 5465,2815 P1.1
  other v1: 4115,1540 3860,1545 3990,1545 5100,1545 5230,1545 5485,1545 4265,1550 4430,1550 5365,1550 4575,1555 4730,1555 4905,1565 4900,1695 5070,1695 5220,1695 4115,1700 4260,1700 4575,1700 4730,1700 3965,1705 4415,1705 5365,1705 5515,1710 5375,1890 5485,1890 4255,1895 4475,1900 5225,1900 3985,1925 4880,1975 4345,2005 4675,2040 5240,2040 5375,2040 5490,2045 4765,2125 5375,2170 5490,2170 5245,2175 2920,2190 4450,2205 4660,2240 2760,2275 5495,2305 5375,2310 5245,2315 4790,2360 4590,2370 2920,2380 5490,2430 5375,2435 5250,2440 4725,2500 2740,2520 5255,2555 5375,2560 5485,2560 2920,2590 2660,3315 2425,3330 4910,3335 2555,3435 2425,3555 2665,3555
Input: R3.1 U1.25 | length 174.7
  Top Layer w10: U1.25 4045,2940.35 4055.35,2930 R3.1
MISO: P.1 U1.16 | length 1165
  Top Layer w10: U1.16 3971.06,2603.82 3971.06,2573.94 4003,2542 v1(4005,2542)
  Bottom Layer w10: P.1 3892,3507 3892,3418 4005,3305 v1(4005,2542)
MOSI: P.4 U1.15 | length 919.8
  Top Layer w10: v1(3891,2743) 3933.74,2700.26 U1.15
  Bottom Layer w10: P.4 3840,3366 3934,3272 3934,2786 v1(3891,2743)
NetC4_2: C4.2 U1.20 | length 116.6
  Top Layer w10: U1.20 4128.82,2759.25 C4.2
NetC5_2: C5.2 L1.2 U1.18 | length 217.1
  Top Layer w10: U1.18 4118.9,2696.26 4134.57,2680.59 4134.57,2586.97 L1.2
NetC6_2: C6.2 R3.2 R10.2 Tn.1 | length 2352.6
  Top Layer w10: R10.2 3305,2514 v1(3366,2514) ; v1(4465,2845) 4210.43,2845 C6.2 4214.37,2858.94 R3.2 4491,2930 4672.6,3111.6 Tn.1
  Bottom Layer w10: v1(3366,2514) 3480,2628 3791,2628 3919,2500 4135,2500 4454.22,2819.22 4454.22,2823.39 4465,2834.18 v1(4465,2845)
NetC8_2: C8.2 C10.2 U2.4 | length 692.6
  Top Layer w10: v1(2854.57,3268) 2854.57,3409.57 C8.2 ; U2.4 v1(3266,3115)
  Bottom Layer w10: v1(2854.57,3268) 3130,3268 3266,3132 v1(3266,3115)
NetC11_1: C11.1 U2.13 | length 1484.3
  Top Layer w10: U2.13 3472,3115 3517,3160 3517,3560 3560,3603 3765,3603 3788,3580 3788,3539.85 3820.33,3507.52 3960.48,3507.52 4085.43,3382.57 C11.1
NetC12_2: C12.2 Q2.3 U2.7 | length 551.2
  Top Layer w10: Q2.3 2991.69,2880 ; C12.2 2991.69,2762.87 2991.69,2880 ; U2.7 3240,2965 3253,2952 3253,2879 3240,2866 3005.69,2866 2991.69,2880
NetC13_2: C13.2 Q2.1 U2.8 | length 348.4
  Top Layer w10: C13.2 3065.43,3076.87 3078.31,3064 Q2.1 3110,2976.5 3171.5,2915 U2.8
NetC21_1: C21.1 U4.6 | length 433
  Top Layer w10: v1(3700,2230) 3700,2435.87 C21.1 ; v1(3815,2225) 3822.65,2232.65 3842.65,2232.65 3867.75,2257.75 3867.75,2281.72 U4.6
  Bottom Layer w10: v1(3700,2230) 3810,2230 v1(3815,2225)
NetC21_2: C21.2 L3.1 U4.5 | length 711.7
  Top Layer w10: C21.2 v1(3780,2525) ; U4.5 3910,2260 3920,2250 L3.1
  Bottom Layer w10: v1(3780,2525) 3997.35,2307.65 3997.35,2252.35 v1(3995,2250)
NetC22_2: C22.2 C23.1 C24.1 D3.2 L3.2 R6.2 R7.2 R8.2 | length 5708.8
  Top Layer w10: R8.2 2385,1825.63 v1(2385,1975) 2385,2109.37 R7.2 ; v1(2730,1940) 2879.37,2089.37 R6.2 ; C22.2 3710,1835 v1(3745,1800) ; v1(4150,1930) 4150,2093.43 L3.2 4459,2098.43 4642.43,1915 C23.1 ; D3.2 4865,2115 C23.1 ; C24.1 5110,2215.79 5110,1960 C23.1
  Bottom Layer w10: v1(2385,1975) 2695,1975 v1(2730,1940) 2730,1620 2795,1555 3700,1555 3745,1600 v1(3745,1800) 4085,1800 4150,1865 v1(4150,1930)
NetD1_2: D1.2 R2.1 | length 879.3
  Top Layer w10: D1.2 3855,1984 3835,2004 3835,2105 3760,2180 3760,2315 3827,2382 3920,2382 3948.74,2410.74 R2.1
NetD2_1: "Relay Input.1" D2.1 Tn.3 | length 380.8
  Top Layer w10: D2.1 4705.28,3250.28 Tn.3 Tn.3@4710,3266.76 ; 4695,3491.14 4710,3476.14 4710,3320 4710,3315 Tn.3@4710,3262.87
NetD4_2: D4.2 J2.1 | length 1193.7
  Top Layer w10: J2.1 2817,2860.35 2817,2976 2814,2979 2814,3520 2835,3541 3187,3541 3208,3520 3208,3465 D4.2
NetR2_2: R2.2 U1.12 | length 177.4
  Top Layer w10: U1.12 3839.25,2557.75 3870,2527 R2.2
NetR4_1: R4.1 U2.2 | length 972.4
  Top Layer w10: U2.2 3341,3215 3345,2849 3363.08,2830.92 v1(3366.22,2830.92) ; v1(3528.93,2950.5) 3530.5,2950.5 3615.63,3035.63 R4.1
  Bottom Layer w10: v1(3366.22,2830.92) 3365,2832.14 3365,2880 3432,2947 3525.43,2947 v1(3528.93,2950.5)
NetR5_1: R5.1 U2.3 | length 1075
  Top Layer w10: U2.3 3292.92,3165 3312.91,3145 3312.91,2822.5 3346.9,2788.52 3440,2788.52 3466,2814.52 3466,2874.99 3465.5,2875.5 3465.5,2896.96 ; 3465.51,2896.98 3465.51,2908.65 3466,2909.14 3466,3040.37 3610.63,3185 R5.1
NetR9_1: R9.1 R15.2 | length 126.8
  Top Layer w10: R9.1 2386.26,1589.37 R15.2
NetR11_1: R11.1 R16.2 | length 106.8
  Top Layer w10: R11.1 2390.63,2214.37 R16.2
NetR12_1: R12.1 R13.1 | length 101.3
  Top Layer w10: R12.1 R13.1
NetR14_1: R14.1 R17.2 | length 115.8
  Top Layer w10: R14.1 3191.97,2087.4 R17.2
P_9V: 5V.1 R8.1 R9.2 | length 549.4
  Top Layer w10: R8.1@2465,1824.37 2465,1705 5V.1
P_12V: 12V.1 R7.1 R11.2 | length 980.8
  Top Layer w10: R11.2 2465,2110.63 R7.1 2465,2109.37 2465,1935 2645,1755 v1(2783,1755)
  Bottom Layer w10: v1(2783,1755) 3025,1755 12V.1
P_24V: 24V.1 R6.1 R14.2 | length 486.9
  Top Layer w10: R6.1 R14.2 3190,1968 3311,1847 3311,1780 3260,1729 24V.1
Relay_source: C25.2 D3.1 P2.1 | length 1428.3
  Top Layer w10: P2.1 4230,3225 4330.95,3124.05 4586.2,3124.05 4610,3147.86 4610,3199.14 4615.86,3205 4684.76,3205 4699.41,3190.35 4699.41,3110.12 4684.13,3094.85 C25.2 4684.13,2720 4694.13,2710 4865,2710 D3.1
Relay_ın: "Relay Input.2" C17.2 D2.3 IC1.1 P2.2 | length 3052
  Top Layer w10: D2.3 4545,3164.72 4545,3491.14 ; IC1.1 C17.2
  Bottom Layer w10: P2.2 4256.14,3491.14 4545,3491.14 4606.86,3553 5230,3553 5577,3206 5577,2720 5497,2640 5160,2640 IC1.1
RESET: C11.2 P.5 R1.1 U1.29 | length 878
  Top Layer w10: P.5 3790,3505 3790,3221.63 3855.63,3156 R1.1 R1.1@3855.63,3099.37 ; U1.29 3844.92,2946.02 3844.92,2976.09 3855.63,2986.8 R1.1@3855.63,3099.37 ; C11.2 4014.57,3086.57 4000,3072 3883,3072 3869.33,3085.67 3869.33,3092.44 3862.4,3099.37 R1.1@3855.63,3099.37
RXD: R5.2 U1.30 | length 341
  Top Layer w10: R5.2 3702.19,3202.18 3731.82,3202.18 3807.76,3126.24 U1.30
SCK: P.3 U1.17 | length 1025.2
  Top Layer w10: v1(3894,2818) 3973,2739 3973,2680 3988.24,2664.76 U1.17
  Bottom Layer w10: P.3 3790,3505 3790,2922 v1(3894,2818)
TXD: R4.2 U1.31 | length 208.6
  Top Layer w10: R4.2 3694.37,3080 3776.26,2998.11 U1.31
VIN: C14.1 C15.2 P1.3 R13.2 U4.2 U4.3 | length 2999.3
  Top Layer w10: C15.2 3888.1,2126.39 3888.1,2148.1 3910,2170 U4.2 U4.3 3948.7,2198.7 3948.7,2141.3 v1(3950,2140)
  Top Layer w36: R13.2 5334.37,3110.63 5385,3060 P1.3
  Bottom Layer w20: C14.1 3611.5,1771.5 3651.5,1771.5 3950,2070 v1(3950,2140) 4870,3060 P1.3
XTAL1: C2.1 Q1.1 U1.7 | length 1262.6
  Top Layer w10: v1(3225,2588) 3185,2628 3185,2700 3221.61,2736.61 Q1.1 ; C2.1 3591.54,2734.32 3620.68,2734.32 3653.07,2701.93 3683.98,2701.93 U1.7 3695.32,2701.93 3756.93,2701.93 3820.96,2765.96 3820.96,2829.04 v1(3815,2835)
  Bottom Layer w10: v1(3225,2588) 3472,2835 v1(3815,2835)
XTAL2: C1.2 Q1.3 U1.8 | length 444.3
  Top Layer w10: Q1.3 3327.99,2620 3347.99,2600 3570,2600 3590,2620 C1.2 3604.76,2664.76 U1.8
pads on no net: D2.2 J2.5 P1.2 U1.1 U1.2 U1.9 U1.10 U1.11 U1.13 U1.14 U1.19 U1.22 U1.23 U1.24 U1.26 U1.27 U1.28 U1.32 U2.9 U2.10 U2.11 U2.12 U2.14 U2.15

## Polygon pours and split planes (outlines as drawn)
GND on Top Layer "GND_L01_P000" (solid, remove dead copper, pour order 0): 2325,3655 5665,3655 5665,1495 2325,1495
GND on Bottom Layer "GND_L02_P001" (solid, remove dead copper, pour order 1): 2325,3655 5665,3655 5665,1495 2325,1495

## Silkscreen, mask and mechanical layers (free items; w line width, h text height)
Top Overlay:
  text "+5V" at 4300,3635 h30 r270
  text "Src" at 4285,3330 h30